# Altium PCB Proyecto_Receptaculo_Placa_Interna.PcbDoc
Units mm, origin at the board's own origin, x right, y up, seen from the top; angles counter-clockwise.
Board outline 59.99 x 60 mm, 4 copper layers (Top Layer, Sources, Ground, Bottom Layer), stack 0.603 mm thick; 19 components, 16 nets, 68 pads, 43 vias.
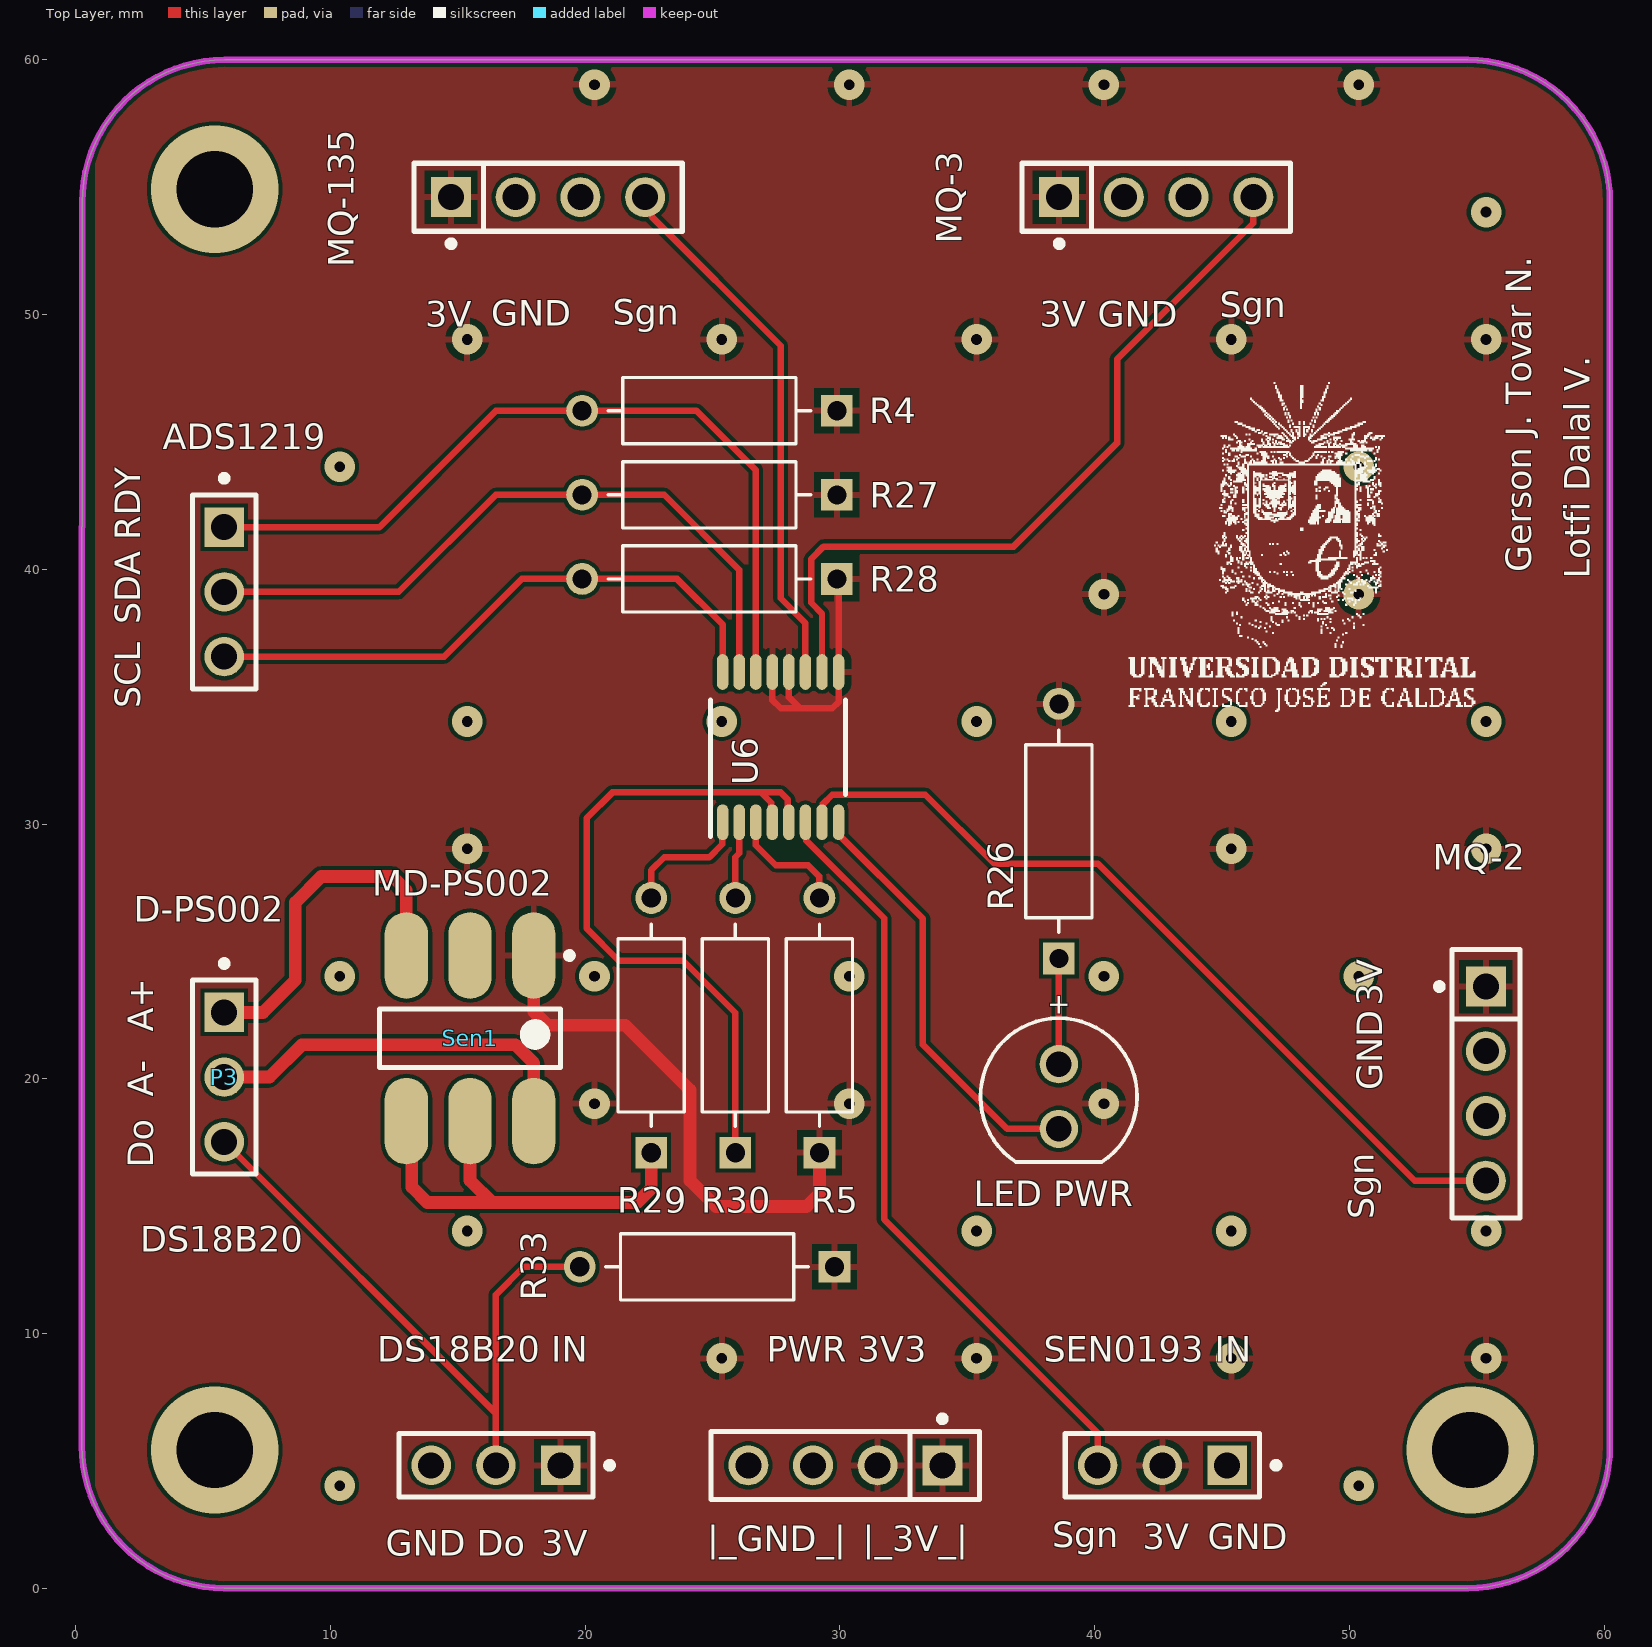
[diagram p0: Top Layer view]
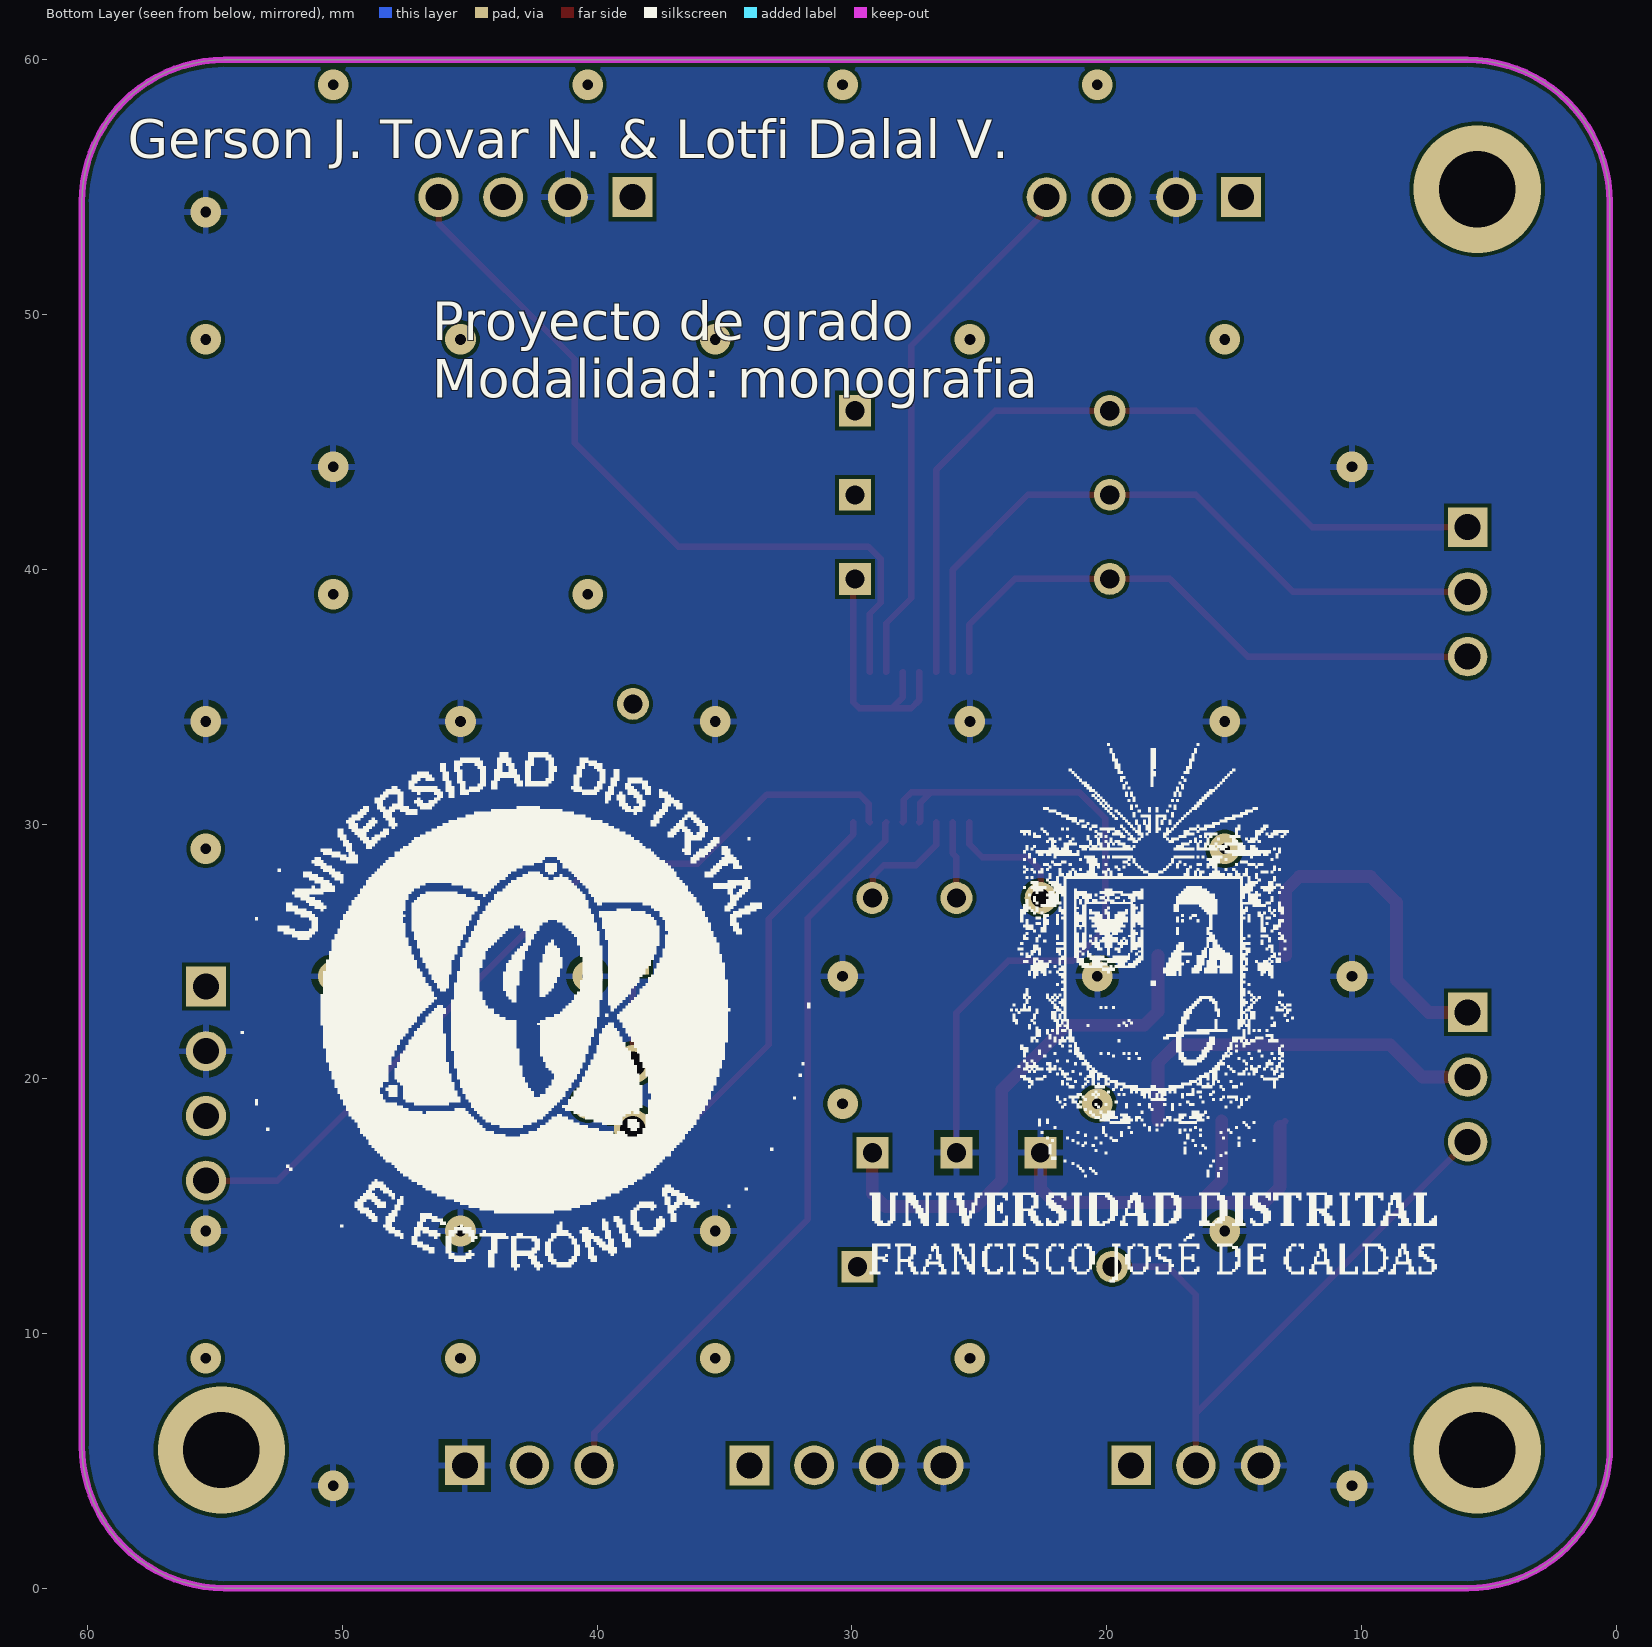
[diagram p1: Bottom Layer view, seen from below]
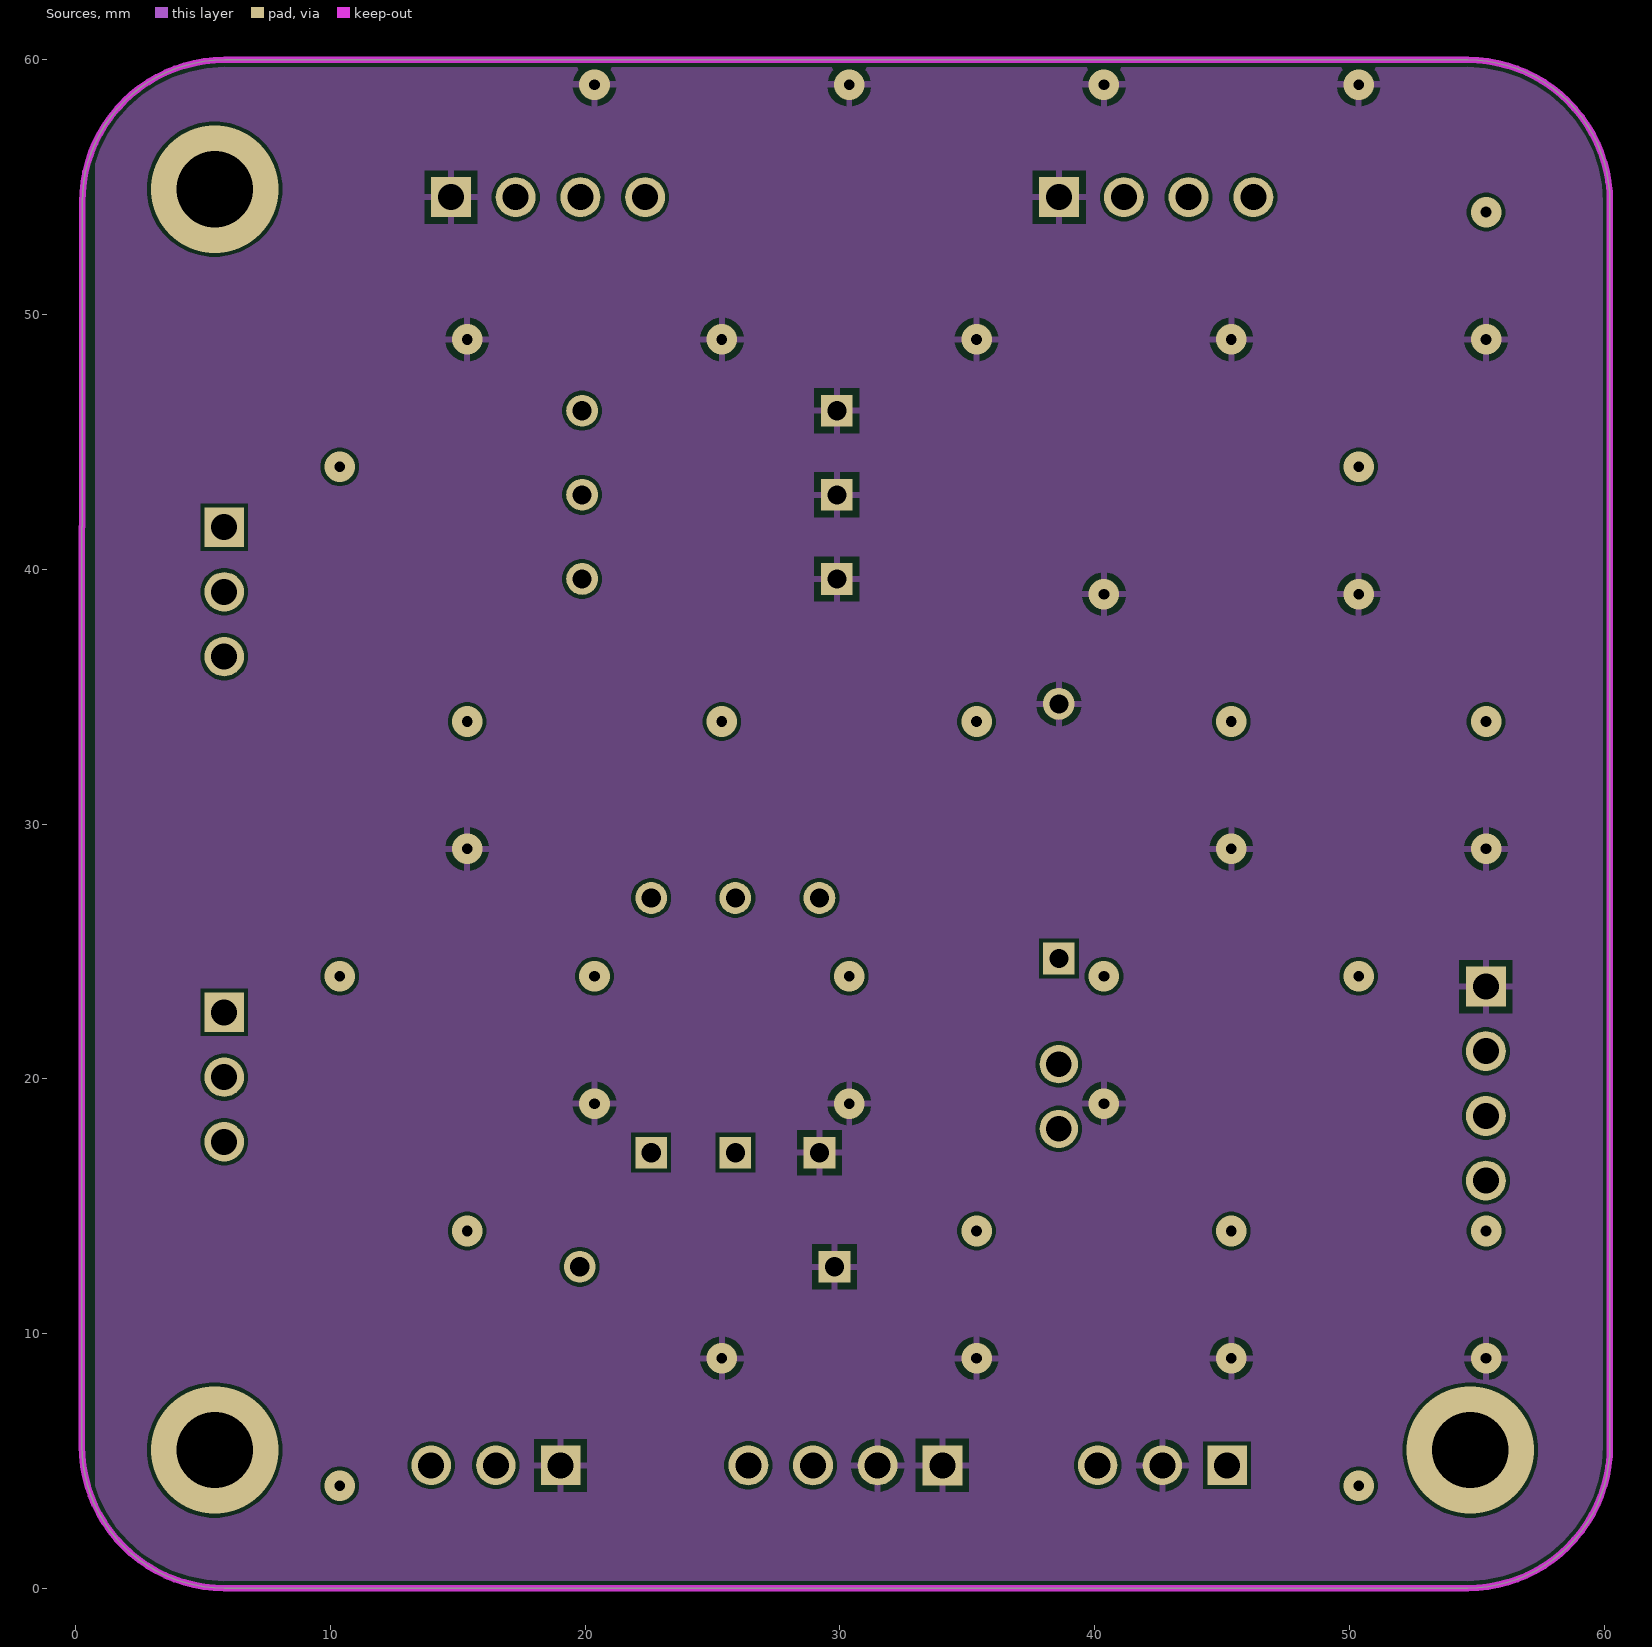
[diagram p2: Sources]
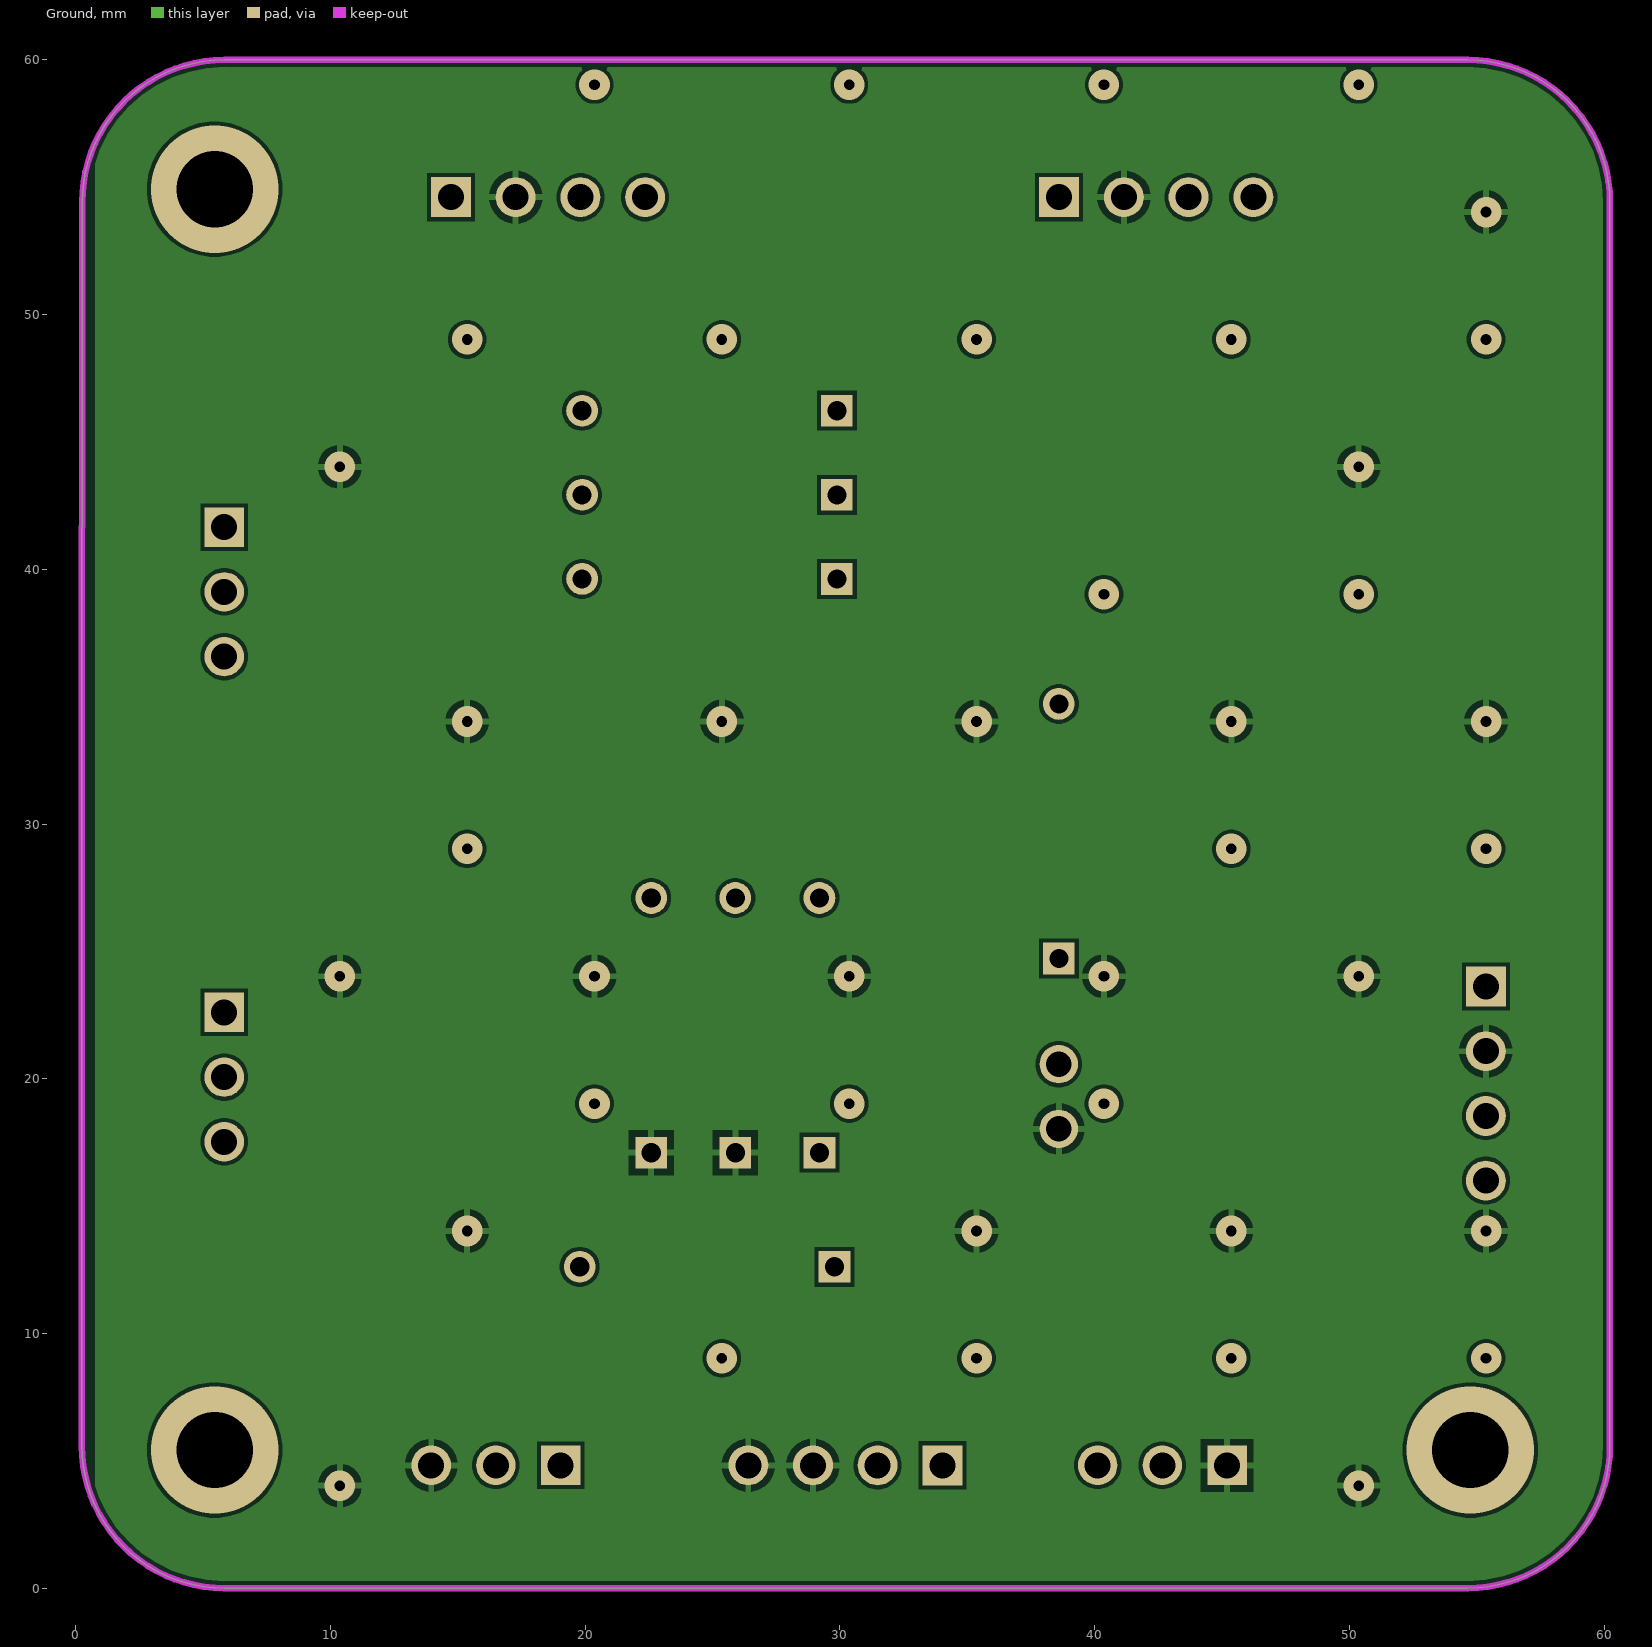
[diagram p3: Ground]
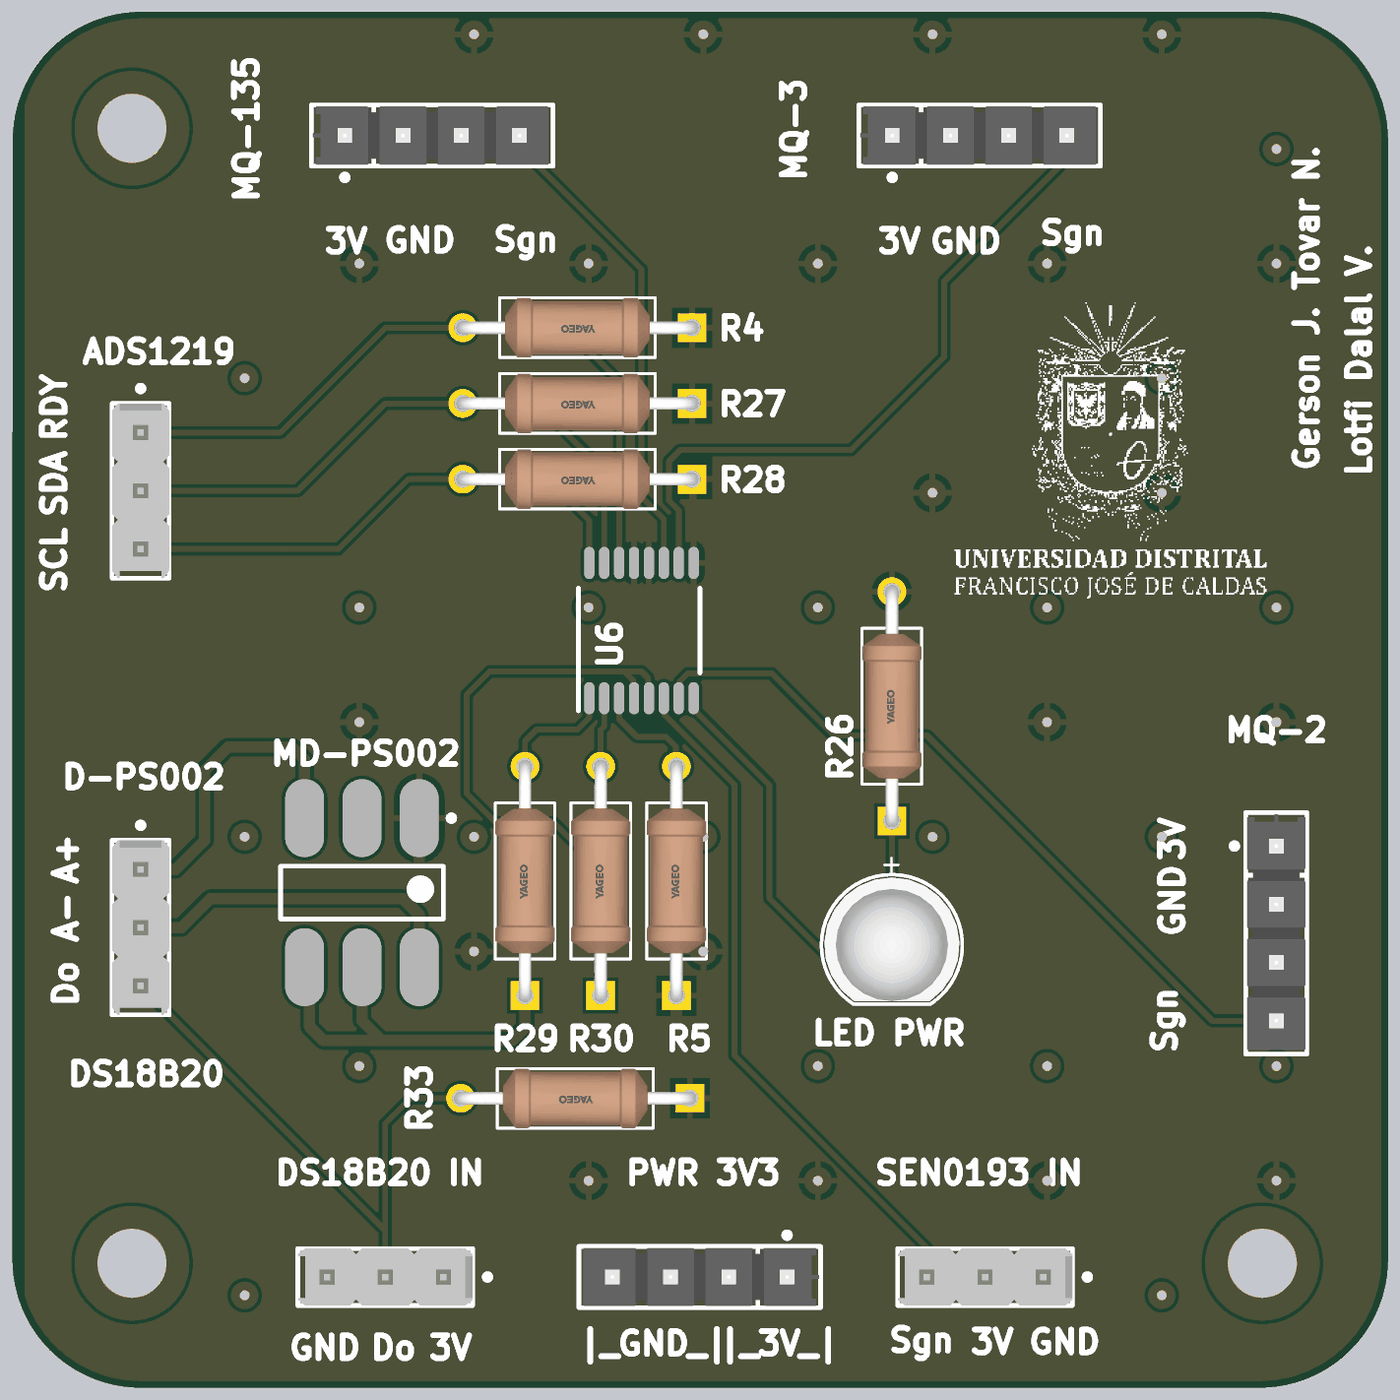
[diagram p4: 3D render of the assembled board from above, using the file's embedded part models]

## Layer stack, top to bottom
Top Solder: solder mask 0.0102, Solder Resist, Dk 3.5
Top Layer: signal copper 0.0356
Dielectric 2: prepreg 0.0711, PP-006, Dk 4.1
Sources: signal copper 0.035
Dielectric 1: dielectric 0.32, FR-4, Dk 4.8
Ground: signal copper 0.035
Dielectric 3: prepreg 0.0711, PP-006, Dk 4.1
Bottom Layer: signal copper 0.0356
Bottom Solder: solder mask 0.0102, Solder Resist, Dk 3.5

## Board outline
0.24,5.592 ccw(c5.828,5.592) 5.828,0.004 54.642,0.004 ccw(c54.642,5.592) 60.23,5.592 60.23,54.414 ccw(c54.642,54.414) 54.642,60.002 5.842,60.002 ccw(c5.842,54.414) 0.254,54.414 0.254,41.67 0.24,41.67

## Design rules (kind name [scope] priority, off if disabled: settings)
Clearance "Stitching GND2" [IsStitchingVia and InNet('GND2') vs (IsVia and (Not IsStitchingVia)) Or IsPad] p1: gap=0.127 ignorepadtopadclearanceinfootprint=TRUE
Clearance "Stitching NetD1_1" [IsStitchingVia and InNet('NetD1_1') vs (IsVia and (Not IsStitchingVia)) Or IsPad] p2: gap=0.127 ignorepadtopadclearanceinfootprint=FALSE
Clearance [All] p3: gap=0.15 ignorepadtopadclearanceinfootprint=TRUE
DiffPairsRouting [All] p1: maxlimit=0.15 minlimit=0.15 mostfreqgap=0.15 toplayer_minwidth=0.117 toplayer_maxwidth=0.117 toplayer_prefwidth=0.117 midlayer1_minwidth=0.064 midlayer1_maxwidth=0.064 midlayer1_prefwidth=0.064 midlayer2_minwidth=0.064 midlayer2_maxwidth=0.064 midlayer2_prefwidth=0.064 bottomlayer_minwidth=0.117 bottomlayer_maxwidth=0.117 bottomlayer_prefwidth=0.117 impedanceprofiledriven=TRUE impedanceprofileid={A861571A-2005-4FA9-A850-810DE9817C21} impedanceprofilevalue=90.000000 maxuncoupledlength=12.7
HoleSize [All] p1: absolutevalues=TRUE maxlimit=5 minlimit=0.3 maxpercent=80.000 minpercent=20.000
MinimumSolderMaskSliver [All] p1: minsoldermaskwidth=0.19
PasteMaskExpansion [All] p1: expansion=0 thpadusetoppaste=TRUE thpadusebottompaste=TRUE
PolygonConnect [All] p1: connectstyle=Relief reliefconductorwidth=0.254 reliefentries=4 polygonreliefangle="90 Angle" airgapwidth=0.254
RoutingVias [All] p1: holewidth=0.711 width=1.27 viastyle="Through Hole" minholewidth=0.3 minwidth=1.27 maxholewidth=5 maxwidth=5.2
SilkToSilkClearance [All] p1: silktosilkclearance=0
SilkToSolderMaskClearance [IsPad] p1: minsilkscreentomaskgap=0 clearancetoexposedcopper=TRUE
SolderMaskExpansion [InComponent('No Component')] p1: expansion=0.102 istentingtop=FALSE
SolderMaskExpansion SolderMaskExpansion_Vias [IsVia] p2: expansion=0.102 istentingtop=TRUE
SupplyNets "Schematic Supply Nets_3" [InNet('GND2')] p1: voltage=0.000
SupplyNets "Schematic Supply Nets_2" [InNet('3V3_VCC')] p2: voltage=0.000
UnRoutedNet [InNet('No Net')] p1:
Width [All] p1: maxlimit=5 minlimit=0.116 preferedwidth=0.254
23 further rules are at their usual default settings.

## Components (designator, comment, footprint, x,y, rotation, side; value= is the part's Value field where it differs from the comment)
ADS1219 "22-28-4033" MOLX-22-28-4033_V 5.828,39.116 r270 top (schematic designator P5)
"DS18B20 IN" "22-28-4033" MOLX-22-28-4033_V 16.496,4.826 r180 top (schematic designator P6)
"LED PWR" "151051BS04000" WL-TMRC_D5.9H8.7 38.594,19.304 r270 top (schematic designator D7)
MQ-2 "TSW-104-23-T-S" FP-TSW-104-23-T-S-MFG 55.358,19.812 r270 top (schematic designator J13)
MQ-3 "TSW-104-23-T-S" FP-TSW-104-23-T-S-MFG 42.418,54.61 r0 top (schematic designator J11)
MQ-135 "TSW-104-23-T-S" FP-TSW-104-23-T-S-MFG 18.542,54.61 r0 top (schematic designator J10)
P3 "22-28-4033" MOLX-22-28-4033_V 5.828,20.066 r270 top
"PWR 3V3" "TSW-104-23-T-S" FP-TSW-104-23-T-S-MFG 30.212,4.826 r180 top (schematic designator J12)
R4 "10 kOhms" FP-FMP100-MFG 24.878,46.228 r180 top
R5 "10 kOhms" FP-FMP100-MFG 29.196,22.098 r90 top
R26 "1 kOhms" FP-FMP100-MFG 38.594,29.718 r90 top
R27 "2.2 kOhms" FP-FMP100-MFG 24.878,42.926 r180 top
R28 "2.2 kOhms" FP-FMP100-MFG 24.878,39.624 r180 top
R29 "10 kOhms" FP-FMP100-MFG 22.592,22.098 r90 top
R30 "10 kOhms" FP-FMP100-MFG 25.894,22.098 r90 top
R33 "4.7 kOhms" FP-FMP100-MFG 24.785,12.62 r180 top
Sen1 "MD-PS002" "SPO-6 (MD-PS002)" 15.48,21.59 r270 top
"SEN0193 IN" "22-28-4033" MOLX-22-28-4033_V 42.658,4.826 r180 top (schematic designator P4)
U6 "ADS1219IPWT" PW0016A_N 27.672,33.02 r90 top

## Footprints (in the part's own frame and the unit in brackets; to place one, negate y for a bottom-side part, rotate by r counter-clockwise, add the part's x,y. Pads: shape width x height; smd on the part's side, far side on the other; paste and mask are expansions set on the pad)
FP-FMP100-MFG [mm]
  rect 1.25x1.25 hole 0.75 paste-2539.97 mask+0: 1(-5,0)
  round 1.25 hole 0.75 paste-2539.97 mask+0: 2(5,0)
  silkscreen extent -3.98,-1.3 3.98,1.3, body extent -5.72,-1.4 5.72,1.4, height 0.25
FP-TSW-104-23-T-S-MFG [mm]
  rect 1.57x1.57 hole 1.02 paste-2539.97 mask+0: 1(-3.81,0)
  round 1.57 hole 1.02 paste-2539.97 mask+0: 2(-1.27,0) 3(1.27,0) 4(3.81,0)
  silkscreen extent -5.27,-1.95 5.27,1.34, body extent -5.37,-1.44 5.37,1.44, height 0.25
MOLX-22-28-4033_V [mm] "THD, 3-Leads, Body 7.62x2.49mm, Pitch 2.54mm"
  rect 1.55x1.55 hole 1.02: 1(-2.54,0)
  round 1.55 hole 1.02: 2(0,0) 3(2.54,0)
  silkscreen extent -4.58,-1.24 3.81,1.24, body extent -3.81,-1.24 3.81,1.24, height 8.38
PW0016A_N [mm]
  oval 1.4x0.45 smd paste+0 mask+0: 1(-2.95,2.275) 2(-2.95,1.625) 3(-2.95,0.975) 4(-2.95,0.325) 5(-2.95,-0.325) 6(-2.95,-0.975) 7(-2.95,-1.625) 8(-2.95,-2.275) 9(2.95,-2.275) 10(2.95,-1.625) 11(2.95,-0.975) 12(2.95,-0.325) 13(2.95,0.325) 14(2.95,0.975) 15(2.95,1.625) 16(2.95,2.275)
  silkscreen extent -3.5,-2.55 1.85,2.75
"SPO-6 (MD-PS002)" [mm]
  oval 3.4x1.7 smd: 1(-3.25,2.5) 2(-3.25,0) 3(-3.25,-2.5) 4(3.25,-2.5) 5(3.25,0) 6(3.25,2.5)
  silkscreen extent -3.37,-3.55 1.15,4.03, body extent -1.55,-3.55 1.55,3.55, height 3.5
WL-TMRC_D5.9H8.7 [mm] "THT Mono-color Round Color LED, 2-leads"
  round 1.5 hole 1: 1(-1.27,0) 2(1.27,0)
  silkscreen extent -3.07,-3.07 2.58,3.08, body extent -2.95,-2.95 2.45,2.95, height 9.2

## Part data
ADS1219 "DS18B20 IN" P3 "SEN0193 IN": library part CMP-1676-00001-5, "Male Header, Pitch 2.54 mm, 1 x 3 Position, Height 8.38 mm, Tail Length 3.18 mm, RoHS, Bulk", Colour=Black, Current Rating="4 A", Manufacturer=Molex, Max Operating Temperature="75 degC", Min Operating Temperature="0 degC", Package Quantity=1, Voltage Rating="250 V", ComponentLink1Description="Manufacturer URL", ComponentLink1URL=http://www.molex.com/, ComponentLink2Description=Datasheet, ComponentLink2URL=http://www.molex.com/pdm_docs/sd/022284033_sd.pdf, Contact Finish=Gold, Contact Material=Brass, Contact Plating=Gold, DatasheetVersion="Rev. G, 01/2012", Height="8.38 mm", Lead Pitch="0.1 inch", Length="7.62 mm", Mount="Through Hole", Mounting Technology="Through Hole", PackageDescription="Male Header, Pitch 2.54 mm, 1 x 3 Position, Height 8.38 mm, Tail Length 3.18 mm", PackageReference=22-28-4033, Packaging=Bulk, Pins=3, REACH SVHC=Unknown, RoHSCompliant=true, Rows=1
"LED PWR": library part CMP-1488-00009-2, Case/Package=Radial, Color=Blue, Forward Current=100mA, Forward Voltage=3.2V, Max Operating Temperature=85°C, Max Reverse Voltage (DC)=5V, Min Operating Temperature=-40°C, Test Current=20mA, Dominant Wavelength=470nm, Height=8.6mm, Length=5mm, Lens Size=5mm, Lens Style="Circular, Diffused, Round", Luminous Intensity=500mcd, Mount="Through Hole", NexarPartId=29717812, Packaging=Bulk, Peak Wavelength=465nm, REACH SVHC=Unknown, RoHS=Compliant, Viewing Angle=40°, Wavelength=470nm, Width=5mm
MQ-2 MQ-3 MQ-135 "PWR 3V3": library part CMP-02766-001388-1, "CONN HEADER VERT 4POS 2.54MM", Color=Black, Max Current Rating=7.6A, Max Operating Temperature=105°C, Max Voltage Rating (AC)=550V, Min Operating Temperature=-55°C, Package Quantity=1, Connector Type="Male Pin", Contact Material=Bronze, Contact Mating Length=0.23inch, Contact Plating=Tin, Contact Type="Male Pin", Depth=2.54mm, Gender=Male, Housing Color=Black, Housing Material=Polyester, Lead Free="Lead Free", Length=10.16mm, Mount="Through Hole", Number of Contacts=4, Number of Positions=4, Number Of Rows=1, Orientation=Straight, Packaging=Bulk, Pitch=2.54mm, Radiation Hardening=No, REACH SVHC="No SVHC", RoHS Compliant=Yes, Series=TSW, Termination=Solder, Width=2.54mm
R4 R5 R26 R27 R28 R29 R30 R33: library part CMP-00621-25629781-1, "Resistor, 1 kOhm, ± 5%, 1 W, Axial Leaded, Metal Film, High Power Flame Proof", Case/Package=Conformal, Max Operating Temperature=155°C, Min Operating Temperature=-55°C, Power Rating=1W, Resistance=1kΩ, Temperature Coefficient=100ppm/°C, Tolerance=5%, Composition="Metal Film", Diameter=2.4mm, Lead Free="Lead Free", Length=6.3mm, Military Standard=Not, Mount="Through Hole", Radiation Hardening=No, RoHS=Compliant, Schedule B="8533210090, 8533210090", Termination=Axial
Sen1: "Absolute pressure sensor", ComponentLink2Description=datasheet, ComponentLink2URL=https://electronperdido.com/wp-content/uploads/2021/12/MD_PS002-Datasheet.zh-CN.en_.pdf, ComponentLink3Description=suplier, ComponentLink3URL=https://www.mactronica.com.co/sensor-de-presion-absoluta-md-ps002?srsltid=AfmBOorZAiXsJNmkeTgQPVhJ-_m5m52EX53D2zdWt7F5gRHtJGt4LCYa, Pressure="150 KPa", Topology="wheatstone bridge"
U6: "24-bit, 1kSPS, 4-ch general-purpose delta-sigma ADC with I2C interface and external Vref inputs 16-TSSOP -40 to 125", Manufacturer_Name="Texas Instruments", Copyright="Copyright (C) 2025 Ultra Librarian. All rights reserved.", Datasheet=https://www.ti.com/lit/gpn/ads1219, Manufacturer_Part_Number=ADS1219IPWT, RefDes=RefDes, Type=TYPE

## Via types
v1: diameter 1.2, hole 0.42, Top Layer to Bottom Layer, tented both sides, 40 vias
v2: diameter 5, hole 3, Top Layer to Bottom Layer, 3 vias

## Nets (pads, with @x,y where several pads share a name; then routed paths per layer and width w, separated by ;. In a path a pad name is that pad's centre, name@x,y a point inside that pad or via, vN(x,y) a via of type N, cw(c..) or ccw(c..) an arc to the next point about the centre after c; other vN are vias at no path point)
3V3_VCC: "DS18B20 IN.1" "PWR 3V3.1" "PWR 3V3.2" "SEN0193 IN.2" MQ-2.1 MQ-3.1 MQ-135.1 R4.1 R5.1 R26.2 R27.1 R28.1 R33.1 Sen1.1 U6.9 U6.12 U6.13 | length 30.9
  Top Layer w0.254: U6.13 27.347,34.869 27.672,34.544 28.434,34.544 ; U6.12 27.997,34.981 28.434,34.544 ; R28.1 29.947,39.555 U6.9 29.947,34.787 29.704,34.544 28.434,34.544
  Top Layer w0.5: Sen1.1 17.98,22.646 18.528,22.098 21.576,22.098 24.116,19.558 24.116,16.002 25.132,14.986 28.688,14.986 29.196,15.494 R5.1
  other v1: 25.366,9.026 35.366,9.026 45.366,9.026 55.366,9.026 20.366,19.026 30.366,19.026 40.366,19.026 15.366,29.026 45.366,29.026 55.366,29.026 40.366,39.026 50.366,39.026 15.366,49.026 25.366,49.026 35.366,49.026 45.366,49.026 55.366,49.026 20.366,59.026 30.366,59.026 40.366,59.026 50.366,59.026
GND2: "DS18B20 IN.3" "LED PWR.2" "PWR 3V3.3" "PWR 3V3.4" "SEN0193 IN.1" MQ-2.2 MQ-3.2 MQ-135.2 R29.1 R30.1 Sen1.4 Sen1.5 U6.4 U6.5 U6.8 | length 62.1
  Top Layer w0.254: Sen1.4 Sen1.4@13.194,18.126 ; R30.1 25.894,22.598 23.854,24.638 21.322,24.638 20.052,25.908 20.052,30.226 21.068,31.242 26.91,31.242 ; U6.4 27.309,30.108 27.309,30.843 26.91,31.242 ; U6.5 27.959,30.108 27.959,30.955 27.672,31.242 26.91,31.242 ; U6.8 29.947,29.595 33.26,26.282 33.26,21.336 36.562,18.034 38.594,18.034
  Top Layer w0.5: Sen1.4@13.194,18.126 13.194,15.748 13.802,15.14 16.349,15.14 ; Sen1.5 15.48,16.009 16.349,15.14 ; R29.1 22.592,15.691 22.041,15.14 16.349,15.14
  other v1: 10.366,4.026 50.366,4.026 15.366,14.026 35.366,14.026 45.366,14.026 55.366,14.026 10.366,24.026 20.366,24.026 30.366,24.026 40.366,24.026 50.366,24.026 15.366,34.026 25.366,34.026 35.366,34.026 45.366,34.026 55.366,34.026 10.366,44.026 50.366,44.026 55.366,54.026
NetADS1219_1: ADS1219.1 R4.2 U6.14 | length 31.7
  Top Layer w0.254: ADS1219.1 11.924,41.656 16.496,46.228 R4.2 24.37,46.228 26.697,43.901 U6.14
NetADS1219_2: ADS1219.2 R27.2 U6.15 | length 27
  Top Layer w0.254: ADS1219.2 12.686,39.116 16.496,42.926 R27.2 23.1,42.926 26.047,39.979 U6.15
NetADS1219_3: ADS1219.3 R28.2 U6.16 | length 23.4
  Top Layer w0.254: ADS1219.3 14.464,36.576 17.512,39.624 R28.2 23.608,39.624 25.397,37.835 U6.16
"NetDS18B20 IN_2": "DS18B20 IN.2" P3.3 R33.2 | length 25.5
  Top Layer w0.254: P3.3 16.496,6.858 ; 16.496,4.826 16.496,6.858 ; R33.2 17.592,12.62 16.496,11.524 16.496,6.858
"NetLED PWR_1": "LED PWR.1" R26.1 | length 4.1
  Top Layer w0.254: 38.594,20.574 R26.1
NetMQ-2_4: MQ-2.4 U6.7 | length 33.2
  Top Layer w0.254: U6.7 29.335,30.108 29.335,30.79 29.696,31.151 33.351,31.151 36.054,28.448 40.118,28.448 52.564,16.002 MQ-2.4
NetMQ-3_4: MQ-3.4 U6.10 | length 30.3
  Top Layer w0.254: U6.10 29.297,38.259 28.872,38.684 28.872,40.407 29.359,40.894 36.816,40.894 40.88,44.958 40.88,48.246 46.227,53.593 46.227,54.197 MQ-3.4@46.482,54.453
NetMQ-135_4: MQ-135.4 U6.11 | length 21.2
  Top Layer w0.254: MQ-135.4 22.604,54.358 22.604,53.85 27.672,48.782 27.672,38.862 28.647,37.887 U6.11
NetP3_1: P3.1 Sen1.3 | length 13.9
  Top Layer w0.5: P3.1 7.352,22.606 8.622,23.876 8.622,26.924 9.638,27.94 12.432,27.94 12.98,27.392 Sen1.3
NetP3_2: P3.2 Sen1.6 | length 15.3
  Top Layer w0.5: P3.2 7.606,20.066 8.876,21.336 17.258,21.336 17.98,20.614 Sen1.6
NetR5_2: R5.2 U6.3 | length 4.8
  Top Layer w0.254: U6.3 26.697,29.169 27.479,28.387 28.749,28.387 29.181,27.955 29.181,27.113 R5.2
NetR29_2: R29.2 U6.1 | length 5.2
  Top Layer w0.254: R29.2 22.592,28.194 23.1,28.702 24.878,28.702 25.386,29.21 25.386,30.059 U6.1
NetR30_2: R30.2 U6.2 | length 3
  Top Layer w0.254: R30.2 25.894,28.702 26.047,28.855 U6.2
"NetSEN0193 IN_3": "SEN0193 IN.3" U6.6 | length 30
  Top Layer w0.254: U6.6 28.685,30.032 28.685,29.35 31.736,26.299 31.736,14.478 40.118,6.096 40.118,4.826
pads on no net: MQ-2.3 MQ-3.3 MQ-135.3 Sen1.2
copper on no net:
  other v2: 5.45,5.426 54.75,5.426 5.45,54.926

## Polygon pours and split planes (outlines as drawn)
GND2 on Bottom Layer "GND2_L04_P015" (solid, remove dead copper, pour order 15): 56.882,59.944 60.184,56.642 60.184,3.302 56.882,0 3.288,0 0.762,2.526 0.762,57.164 3.542,59.944
GND2 on Ground "GND2_L03_P014" (solid, remove dead copper, pour order 14): 56.882,59.944 60.184,56.642 60.184,3.302 56.882,0 3.288,0 0.762,2.526 0.762,57.164 3.542,59.944
3V3_VCC on Sources "3V3_VCC_L02_P013" (solid, remove dead copper, pour order 13): 56.882,59.944 60.184,56.642 60.184,3.302 56.882,0 3.288,0 0.762,2.526 0.762,57.164 3.542,59.944
3V3_VCC on Top Layer "3V3_VCC_L01_P016" (solid, remove dead copper, pour order 16): 56.882,59.944 60.184,56.642 60.184,3.302 56.882,0 3.288,0 0.762,2.526 0.762,57.164 3.542,59.944

## Keep-outs
Keep-Out Layer:
  lines w0.254: 0.24,41.67 0.24,5.592 ccw(c5.828,5.592) 5.828,0.004 54.642,0.004 ccw(c54.642,5.592) 60.23,5.592 60.23,54.414 ccw(c54.642,54.414) 54.642,60.002 5.842,60.002 ccw(c5.842,54.414) 0.254,54.414 0.254,41.67

## Silkscreen, mask and mechanical layers (free items; w line width, h text height)
Top Overlay:
  drawing of 669 lines, arcs and shapes, not listed
  text "Sgn" at 44.921,49.903 h1
  text "Sgn" at 21.082,49.609 h1
  text "GND" at 16.319,49.569 h1
  text "3V" at 13.716,49.53 h1
  text "3V" at 37.846,49.53 h1
  text "GND" at 40.132,49.53 h1
  text "RDY" at 2.526,41.148 h1 r90
  text "Gerson J. Tovar N." at 57.15,39.878 h1 r90
  text "Lotfi Dalal V." at 59.436,39.624 h1 r90
  text "SDA" at 2.526,37.846 h1 r90
  text "SCL" at 2.526,34.544 h1 r90
  text "D-PS002" at 2.272,26.162 h1
  text "3V" at 51.294,22.86 h1 r90
  text "A+" at 3.034,21.844 h1 r90
  text "GND" at 51.294,19.558 h1 r90
  text "A-" at 3.034,19.304 h1 r90
  text "Do" at 3.034,16.51 h1 r90
  text "Sgn" at 50.961,14.478 h1 r90
  text "DS18B20" at 2.526,13.208 h1
  text "Sgn" at 38.34,1.603 h1
  text "3V" at 41.896,1.524 h1
  text "GND" at 44.436,1.524 h1
  text "|_GND_|" at 24.794,1.454 h1
  text "|_3V_|" at 30.89,1.454 h1
  text "GND" at 12.178,1.27 h1
  text "Do" at 15.734,1.27 h1
  text "3V" at 18.274,1.27 h1
Bottom Overlay:
  drawing of 727 lines, arcs and shapes, not listed
  text "Gerson J. Tovar N. & Lotfi Dalal V." at 58.42,56.134 h1.5
  text "Proyecto de grado / Modalidad: monografia" at 46.482,46.736 h1.5

## Text inside footprints (layer, text, board x,y; h text height)
"LED PWR": Top Overlay "+" at 38.264,23.354 h0.8 r270
U6: Top Overlay "RefDes" at 28.307,31.115 h0 r90